# Altium PCB DecadeBox.PcbDoc
Units mil, origin at the board's own origin, x right, y up, seen from the top; angles counter-clockwise.
Board outline 7250 x 4000 mil, 2 copper layers (Top Layer, Bottom Layer); 139 components, 88 nets, 326 pads, 0 vias.
Unrouted connection lines stored in the file: 216.
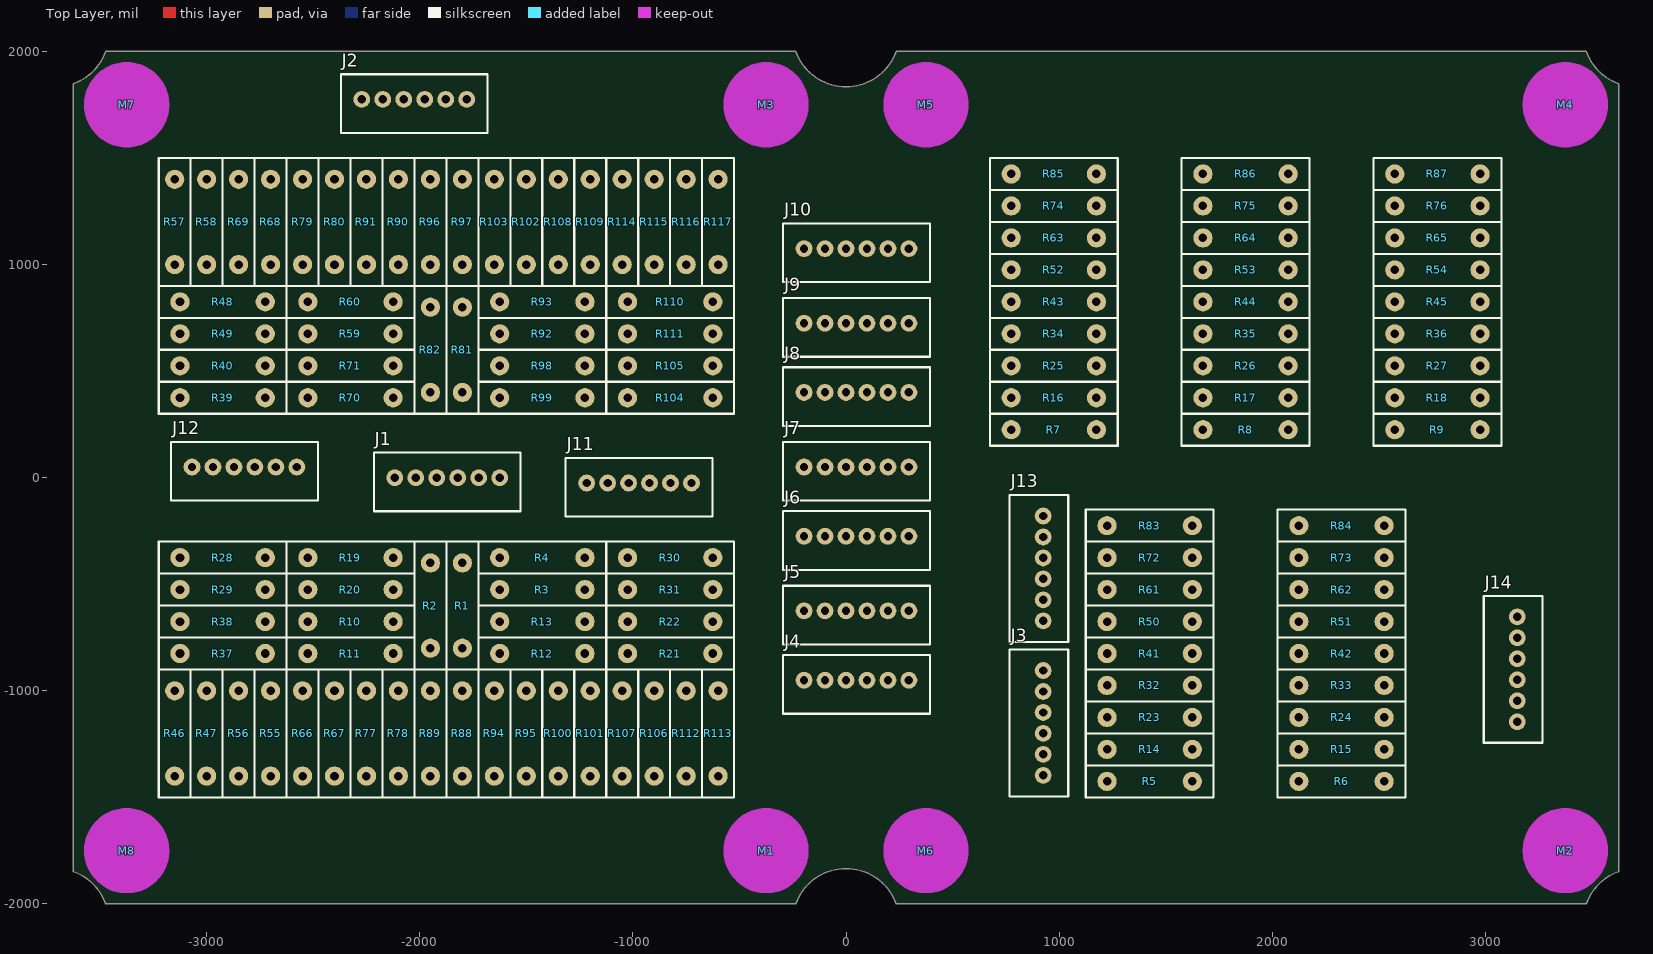
[diagram p0: Top Layer view]
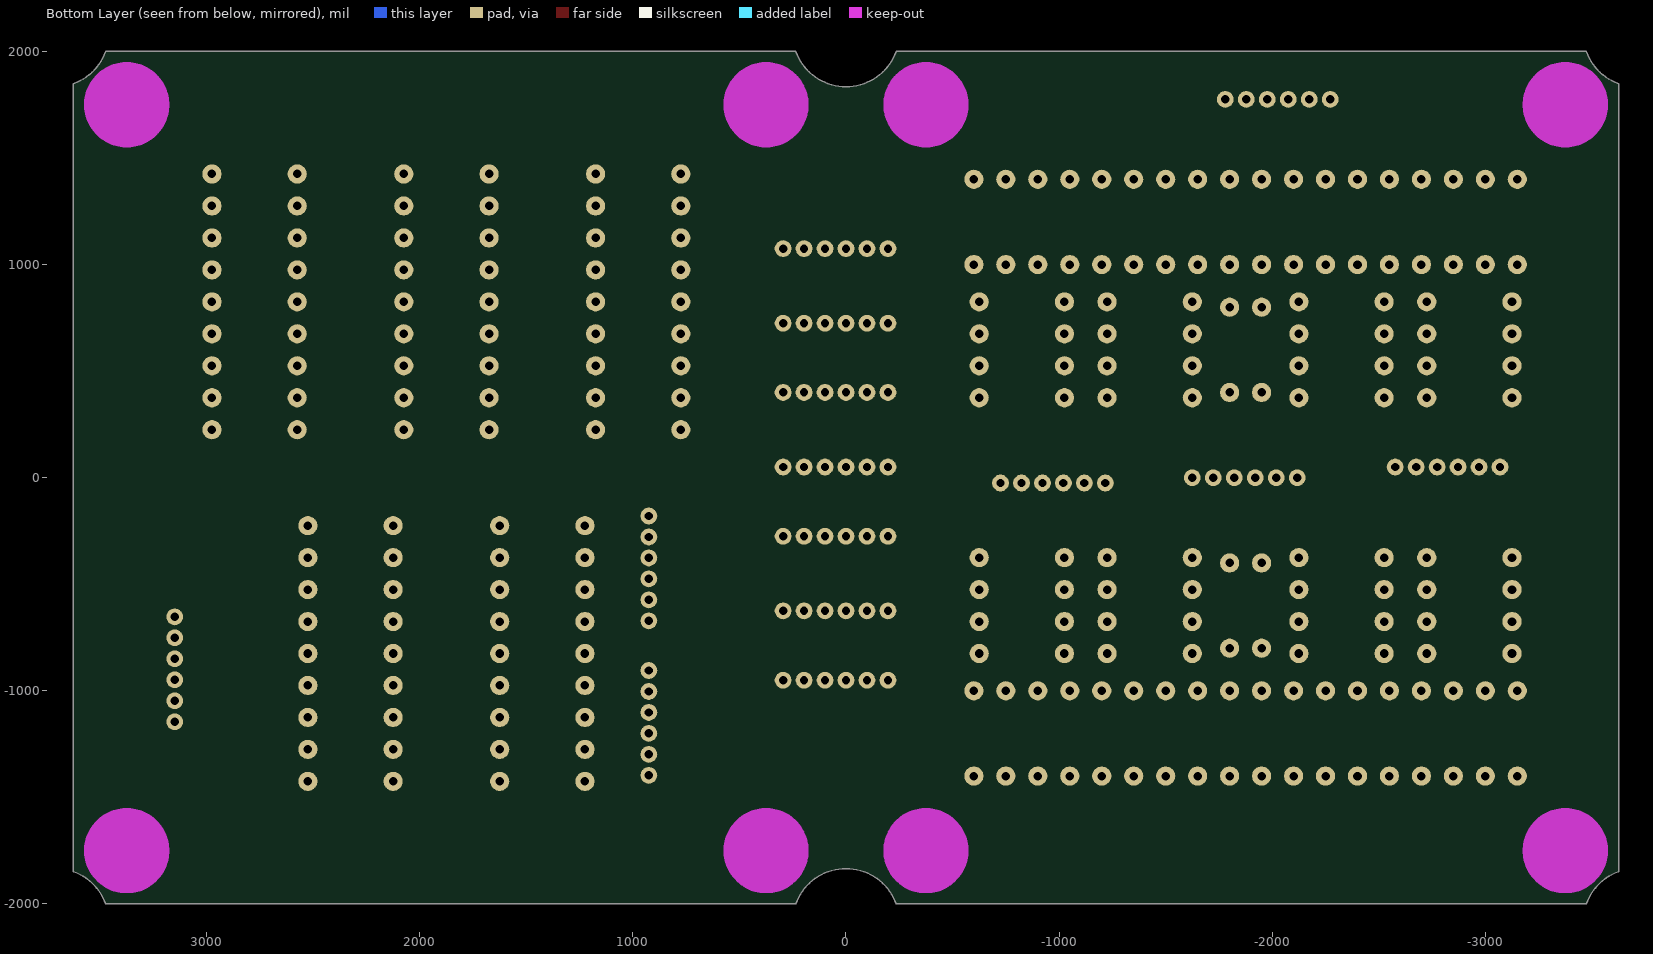
[diagram p1: Bottom Layer view, seen from below]

## Layer stack, top to bottom
Top Solder: solder mask 0.4, Solder Resist, Dk 3.5
Top Layer: signal copper 1.4
Dielectric 1: dielectric 12.6, FR-4, Dk 4.8
Bottom Layer: signal copper 1.4
Bottom Solder: solder mask 0.4, Solder Resist, Dk 3.5

## Board outline
-3473.53,-2000 ccw(c-3709,-2084) -3625,-1848.53 -3625,1848.53 ccw(c-3709,2084) -3473.53,2000 -235.47,2000 ccw(c0,2084) 235.47,2000 3473.53,2000 ccw(c3709,2084) 3625,1848.53 3625,-1848.53 ccw(c3709,-2084) 3473.53,-2000 235.47,-2000 ccw(c0,-2084) -235.47,-2000

## Design rules (kind name [scope] priority, off if disabled: settings)
Clearance [All] p1: gap=10 ignorepadtopadclearanceinfootprint=FALSE except(0: Arc-Hole Track-Hole SMDPad-Hole THPad-Hole Via-Hole Fill-Hole Poly-Hole Region-Hole Text-Hole)
PolygonConnect [All] p1: connectstyle=Relief reliefconductorwidth=10 reliefentries=4 polygonreliefangle="90 Angle" airgapwidth=10
RoutingVias [All] p1: holewidth=28 width=50 viastyle="Through Hole" minholewidth=28 minwidth=50 maxholewidth=28 maxwidth=50
SolderMaskExpansion [All] p1: expansion=4 istentingtop=FALSE
Width [All] p1: maxlimit=200 minlimit=10 preferedwidth=10
30 further rules are at their usual default settings.

## Components (designator, comment, footprint, x,y, rotation, side; value= is the part's Value field where it differs from the comment)
J1 "455-2271-ND" JST-XH -1625,0 r180 top
J2 "455-2271-ND" JST-XH -1779.72,1775 r180 top
J3 "455-2271-ND" JST-XH 925,-1396.85 r90 top
J4 "455-2271-ND" JST-XH 295.28,-950 r180 top
J5 "455-2271-ND" JST-XH 295.28,-625 r180 top
J6 "455-2271-ND" JST-XH 295.28,-275 r180 top
J7 "455-2271-ND" JST-XH 295.28,50 r180 top
J8 "455-2271-ND" JST-XH 295.28,400 r180 top
J9 "455-2271-ND" JST-XH 295.28,725 r180 top
J10 "455-2271-ND" JST-XH 295.28,1075 r180 top
J11 "455-2271-ND" JST-XH -725,-25 r180 top
J12 "455-2271-ND" JST-XH -2576.57,50 r180 top
J13 "455-2271-ND" JST-XH 925,-671.85 r90 top
J14 "455-2271-ND" JST-XH 3150,-1145.28 r90 top
M1 "MOUNTING HOLES" MTGHOLE -375,-1750 r0 top
M2 "MTGHOLE" MTGHOLE 3375,-1750 r0 top
M3 "MTGHOLE" MTGHOLE -375,1750 r0 top
M4 "MTGHOLE" MTGHOLE 3375,1750 r0 top
M5 "MTGHOLE" MTGHOLE 375,1750 r0 top
M6 "MTGHOLE" MTGHOLE 375,-1750 r0 top
M7 "MOUNTING HOLES" MTGHOLE -3375,1750 r0 top
M8 "MTGHOLE" MTGHOLE -3375,-1750 r0 top
R1 "BC3963CT-ND" MRS25 -1800,-600 r270 top value=1Ω
R2 "BC3963CT-ND" MRS25 -1950,-600 r270 top value=1Ω
R3 "BC3963CT-ND" MRS25 -1425,-525 r0 top value=1Ω
R4 "BC3963CT-ND" MRS25 -1425,-375 r0 top value=1Ω
R5 "PPC100ZCT-ND" MRS25 1425,-1425 r0 top value=100Ω
R6 "PPC1.00KZCT-ND" MRS25 2325,-1425 r0 top value=1kΩ
R7 "BC3955CT-ND" MRS25 975,225 r0 top value=10kΩ
R8 "BC3327CT-ND" MRS25 1875,225 r0 top value=100kΩ
R9 "56-MRS25000C1004FRP00CT-ND" MRS25 2775,225 r0 top value=1MΩ
R10 "BC3963CT-ND" MRS25 -2325,-675 r180 top value=1Ω
R11 "BC3963CT-ND" MRS25 -2325,-825 r180 top value=1Ω
R12 "BC3963CT-ND" MRS25 -1425,-825 r0 top value=1Ω
R13 "BC3963CT-ND" MRS25 -1425,-675 r0 top value=1Ω
R14 "PPC100ZCT-ND" MRS25 1425,-1275 r180 top value=100Ω
R15 "PPC1.00KZCT-ND" MRS25 2325,-1275 r180 top value=1kΩ
R16 "BC3955CT-ND" MRS25 975,375 r180 top value=10kΩ
R17 "BC3327CT-ND" MRS25 1875,375 r180 top value=100kΩ
R18 "56-MRS25000C1004FRP00CT-ND" MRS25 2775,375 r180 top value=1MΩ
R19 "BC3963CT-ND" MRS25 -2325,-375 r180 top value=1Ω
R20 "BC3963CT-ND" MRS25 -2325,-525 r180 top value=1Ω
R21 "BC3963CT-ND" MRS25 -825,-825 r0 top value=1Ω
R22 "BC3963CT-ND" MRS25 -825,-675 r0 top value=1Ω
R23 "PPC100ZCT-ND" MRS25 1425,-1125 r0 top value=100Ω
R24 "PPC1.00KZCT-ND" MRS25 2325,-1125 r0 top value=1kΩ
R25 "BC3955CT-ND" MRS25 975,525 r0 top value=10kΩ
R26 "BC3327CT-ND" MRS25 1875,525 r0 top value=100kΩ
R27 "56-MRS25000C1004FRP00CT-ND" MRS25 2775,525 r0 top value=1MΩ
R28 "BC3963CT-ND" MRS25 -2925,-375 r180 top value=1Ω
R29 "BC3963CT-ND" MRS25 -2925,-525 r180 top value=1Ω
R30 "BC3963CT-ND" MRS25 -825,-375 r180 top value=1Ω
R31 "BC3963CT-ND" MRS25 -825,-525 r180 top value=1Ω
R32 "PPC100ZCT-ND" MRS25 1425,-975 r180 top value=100Ω
R33 "PPC1.00KZCT-ND" MRS25 2325,-975 r180 top value=1kΩ
R34 "BC3955CT-ND" MRS25 975,675 r180 top value=10kΩ
R35 "BC3327CT-ND" MRS25 1875,675 r180 top value=100kΩ
R36 "56-MRS25000C1004FRP00CT-ND" MRS25 2775,675 r180 top value=1MΩ
R37 "BC3963CT-ND" MRS25 -2925,-825 r180 top value=1Ω
R38 "BC3963CT-ND" MRS25 -2925,-675 r180 top value=1Ω
R39 "PPC10.0ZCT-ND" MRS25 -2925,375 r180 top value=10Ω
R40 "PPC10.0ZCT-ND" MRS25 -2925,525 r180 top value=10Ω
R41 "PPC100ZCT-ND" MRS25 1425,-825 r0 top value=100Ω
R42 "PPC1.00KZCT-ND" MRS25 2325,-825 r0 top value=1kΩ
R43 "BC3955CT-ND" MRS25 975,825 r0 top value=10kΩ
R44 "BC3327CT-ND" MRS25 1875,825 r0 top value=100kΩ
R45 "56-MRS25000C1004FRP00CT-ND" MRS25 2775,825 r0 top value=1MΩ
R46 "BC3963CT-ND" MRS25 -3150,-1200 r270 top value=1Ω
R47 "BC3963CT-ND" MRS25 -3000,-1200 r270 top value=1Ω
R48 "PPC10.0ZCT-ND" MRS25 -2925,825 r0 top value=10Ω
R49 "PPC10.0ZCT-ND" MRS25 -2925,675 r0 top value=10Ω
R50 "PPC100ZCT-ND" MRS25 1425,-675 r180 top value=100Ω
R51 "PPC1.00KZCT-ND" MRS25 2325,-675 r180 top value=1kΩ
R52 "BC3955CT-ND" MRS25 975,975 r180 top value=10kΩ
R53 "BC3327CT-ND" MRS25 1875,975 r180 top value=100kΩ
R54 "56-MRS25000C1004FRP00CT-ND" MRS25 2775,975 r180 top value=1MΩ
R55 "BC3963CT-ND" MRS25 -2700,-1200 r270 top value=1Ω
R56 "BC3963CT-ND" MRS25 -2850,-1200 r270 top value=1Ω
R57 "PPC10.0ZCT-ND" MRS25 -3150,1200 r90 top value=10Ω
R58 "PPC10.0ZCT-ND" MRS25 -3000,1200 r90 top value=10Ω
R59 "PPC10.0ZCT-ND" MRS25 -2325,675 r0 top value=10Ω
R60 "PPC10.0ZCT-ND" MRS25 -2325,825 r0 top value=10Ω
R61 "PPC100ZCT-ND" MRS25 1425,-525 r0 top value=100Ω
R62 "PPC1.00KZCT-ND" MRS25 2325,-525 r0 top value=1kΩ
R63 "BC3955CT-ND" MRS25 975,1125 r0 top value=10kΩ
R64 "BC3327CT-ND" MRS25 1875,1125 r0 top value=100kΩ
R65 "56-MRS25000C1004FRP00CT-ND" MRS25 2775,1125 r0 top value=1MΩ
R66 "BC3963CT-ND" MRS25 -2550,-1200 r90 top value=1Ω
R67 "BC3963CT-ND" MRS25 -2400,-1200 r90 top value=1Ω
R68 "PPC10.0ZCT-ND" MRS25 -2700,1200 r270 top value=10Ω
R69 "PPC10.0ZCT-ND" MRS25 -2850,1200 r270 top value=10Ω
R70 "PPC10.0ZCT-ND" MRS25 -2325,375 r0 top value=10Ω
R71 "PPC10.0ZCT-ND" MRS25 -2325,525 r0 top value=10Ω
R72 "PPC100ZCT-ND" MRS25 1425,-375 r180 top value=100Ω
R73 "PPC1.00KZCT-ND" MRS25 2325,-375 r180 top value=1kΩ
R74 "BC3955CT-ND" MRS25 975,1275 r180 top value=10kΩ
R75 "BC3327CT-ND" MRS25 1875,1275 r180 top value=100kΩ
R76 "56-MRS25000C1004FRP00CT-ND" MRS25 2775,1275 r180 top value=1MΩ
R77 "BC3963CT-ND" MRS25 -2250,-1200 r270 top value=1Ω
R78 "BC3963CT-ND" MRS25 -2100,-1200 r270 top value=1Ω
R79 "PPC10.0ZCT-ND" MRS25 -2550,1200 r90 top value=10Ω
R80 "PPC10.0ZCT-ND" MRS25 -2400,1200 r90 top value=10Ω
R81 "PPC10.0ZCT-ND" MRS25 -1800,600 r90 top value=10Ω
R82 "PPC10.0ZCT-ND" MRS25 -1950,600 r90 top value=10Ω
R83 "PPC100ZCT-ND" MRS25 1425,-225 r0 top value=100Ω
R84 "PPC1.00KZCT-ND" MRS25 2325,-225 r0 top value=1kΩ
R85 "BC3955CT-ND" MRS25 975,1425 r0 top value=10kΩ
R86 "BC3327CT-ND" MRS25 1875,1425 r0 top value=100kΩ
R87 "56-MRS25000C1004FRP00CT-ND" MRS25 2775,1425 r0 top value=1MΩ
R88 "BC3963CT-ND" MRS25 -1800,-1200 r90 top value=1Ω
R89 "BC3963CT-ND" MRS25 -1950,-1200 r90 top value=1Ω
R90 "PPC10.0ZCT-ND" MRS25 -2100,1200 r270 top value=10Ω
R91 "PPC10.0ZCT-ND" MRS25 -2250,1200 r270 top value=10Ω
R92 "PPC10.0ZCT-ND" MRS25 -1425,675 r0 top value=10Ω
R93 "PPC10.0ZCT-ND" MRS25 -1425,825 r0 top value=10Ω
R94 "BC3963CT-ND" MRS25 -1650,-1200 r270 top value=1Ω
R95 "BC3963CT-ND" MRS25 -1500,-1200 r270 top value=1Ω
R96 "PPC10.0ZCT-ND" MRS25 -1950,1200 r90 top value=10Ω
R97 "PPC10.0ZCT-ND" MRS25 -1800,1200 r90 top value=10Ω
R98 "PPC10.0ZCT-ND" MRS25 -1425,525 r0 top value=10Ω
R99 "PPC10.0ZCT-ND" MRS25 -1425,375 r0 top value=10Ω
R100 "BC3963CT-ND" MRS25 -1350,-1200 r90 top value=1Ω
R101 "BC3963CT-ND" MRS25 -1200,-1200 r90 top value=1Ω
R102 "PPC10.0ZCT-ND" MRS25 -1500,1200 r270 top value=10Ω
R103 "PPC10.0ZCT-ND" MRS25 -1650,1200 r270 top value=10Ω
R104 "PPC10.0ZCT-ND" MRS25 -825,375 r0 top value=10Ω
R105 "PPC10.0ZCT-ND" MRS25 -825,525 r0 top value=10Ω
R106 "BC3963CT-ND" MRS25 -900,-1200 r270 top value=1Ω
R107 "BC3963CT-ND" MRS25 -1050,-1200 r270 top value=1Ω
R108 "PPC10.0ZCT-ND" MRS25 -1350,1200 r90 top value=10Ω
R109 "PPC10.0ZCT-ND" MRS25 -1200,1200 r90 top value=10Ω
R110 "PPC10.0ZCT-ND" MRS25 -825,825 r0 top value=10Ω
R111 "PPC10.0ZCT-ND" MRS25 -825,675 r0 top value=10Ω
R112 "BC3963CT-ND" MRS25 -750,-1200 r90 top value=1Ω
R113 "BC3963CT-ND" MRS25 -600,-1200 r90 top value=1Ω
R114 "PPC10.0ZCT-ND" MRS25 -1050,1200 r270 top value=10Ω
R115 "PPC10.0ZCT-ND" MRS25 -900,1200 r270 top value=10Ω
R116 "PPC10.0ZCT-ND" MRS25 -750,1200 r90 top value=10Ω
R117 "PPC10.0ZCT-ND" MRS25 -600,1200 r90 top value=10Ω

## Footprints (in the part's own frame and the unit in brackets; to place one, negate y for a bottom-side part, rotate by r counter-clockwise, add the part's x,y. Pads: shape width x height; smd on the part's side, far side on the other; paste and mask are expansions set on the pad)
JST-XH [mm]
  round 2 hole 1: 1(0,0) 2(2.5,0) 3(5,0) 4(7.5,0) 5(10,0) 6(12.5,0)
  silkscreen extent -2.5,-3 15,4
MRS25 [mil] "VISHAY"
  round 90 hole 40: 1(-200,0) 2(200,0)
  silkscreen extent -300,-75 300,75, body extent -128,-49 128,49, height 98
MTGHOLE [mil]
  round 0 hole 128 unplated mask+125: 0(0,0)
  Keep-Out Layer circle w200: c0,0 r100

## Part data
J1 J2 J3 J4 J5 J6 J7 J8 J9 J10 J11 J12 J13 J14: library part JST-6PIN, "JST XH, Through-Hole, 6-Pos", Supplier 1=Digi-Key, Supplier Part Number 1=455-2271-ND
M1 M7: library part MTGHOLE, "MOUNTING HOLE"
M2 M3 M4 M5 M6 M8: "MOUNTING HOLE"
R1 R2 R3 R4 R10 R11 R12 R13 R19 R20 R21 R22 R28 R29 R30 R31 R37 R38 R46 R47 R55 R56 R66 R67 R77 R78 R88 R89 R94 R95 R100 R101 R106 R107 R112 R113: library part RES-1OHM, "RES 1Ω 1% 50ppm/K 600mW", Power=600mW, Tolerance="1% + 50ppm/K", Supplier 1=Digi-Key, Supplier Part Number 1=BC3963CT-ND
R5 R14 R23 R32 R41 R50 R61 R72 R83: library part RES-100OHM, "RES 100Ω 1% 50ppm/K 600mW", Power=600mW, Tolerance="1% + 50ppm/K", Supplier 1=Digi-Key, Supplier Part Number 1=PPC100ZCT-ND
R6 R15 R24 R33 R42 R51 R62 R73 R84: library part RES-1KOHM, "RES 1kΩ 1% 50ppm/K 600mW", Power=600mW, Tolerance="1% + 50ppm/K", Supplier 1=Digi-Key, Supplier Part Number 1=PPC1.00KZCT-ND
R7 R16 R25 R34 R43 R52 R63 R74 R85: library part RES-10KOHM, "RES 10kΩ 1% 50ppm/K 600mW", Power=600mW, Tolerance="1% + 50ppm/K", Supplier 1=Digi-Key, Supplier Part Number 1=BC3955CT-ND
R8 R17 R26 R35 R44 R53 R64 R75 R86: library part RES-100KOHM, "RES 100kΩ 1% 50ppm/K 600mW", Power=600mW, Tolerance="1% + 50ppm/K", Supplier 1=Digi-Key, Supplier Part Number 1=BC3327CT-ND
R9 R18 R27 R36 R45 R54 R65 R76 R87: library part RES-1MOHM, "RES 1MΩ 1% 50ppm/K 600mW", Power=600mW, Tolerance="1% + 50ppm/K", Supplier 1=Digi-Key, Supplier Part Number 1=56-MRS25000C1004FRP00CT-ND
R39 R40 R48 R49 R57 R58 R59 R60 R68 R69 R70 R71 R79 R80 R81 R82 R90 R91 R92 R93 R96 R97 R98 R99 R102 R103 R104 R105 R108 R109 R110 R111 R114 R115 R116 R117: library part RES-10OHM, "RES 10Ω 1% 50ppm/K 600mW", Power=600mW, Tolerance="1% + 50ppm/K", Supplier 1=Digi-Key, Supplier Part Number 1=PPC10.0ZCT-ND

## Nets (pads, with @x,y where several pads share a name; then routed paths per layer and width w, separated by ;. In a path a pad name is that pad's centre, name@x,y a point inside that pad or via, vN(x,y) a via of type N, cw(c..) or ccw(c..) an arc to the next point about the centre after c; other vN are vias at no path point)
NetR1_2: R1.2 R2.2 R10.1 R11.1
NetR3_2: R3.2 R4.2 R12.1 R13.1
NetR19_2: R19.2 R20.2 R28.1 R29.1
NetR21_2: R21.2 R22.2 R30.1 R31.1
NetR37_2: R37.2 R38.2 R46.1 R47.1
NetR39_2: R39.2 R40.2 R48.1 R49.1
NetR55_2: R55.2 R56.2 R66.1 R67.1
NetR57_2: R57.2 R58.2 R68.1 R69.1
NetR59_2: R59.2 R60.2 R70.1 R71.1
NetR77_2: R77.2 R78.2 R88.1 R89.1
NetR79_2: R79.2 R80.2 R90.1 R91.1
NetR81_2: R81.2 R82.2 R92.1 R93.1
NetR94_2: R94.2 R95.2 R100.1 R101.1
NetR96_2: R96.2 R97.2 R102.1 R103.1
NetR98_2: R98.2 R99.2 R104.1 R105.1
NetR106_2: R106.2 R107.2 R112.1 R113.1
NetR108_2: R108.2 R109.2 R114.1 R115.1
NetR110_2: R110.2 R111.2 R116.1 R117.1
P0_1K: J4.2 R6.1
P0_1M: J9.2 R9.1
P0_1R: J1.2 R112.2 R113.2
P0_10K: J5.2 R7.1
P0_10R: J2.2 R57.1 R58.1
P0_100K: J7.2 R8.1
P0_100R: J3.2 R5.1
P1_1K: J4.3 R6.2 R15.1
P1_1M: J9.3 R9.2 R18.1
P1_1R: J1.3 R100.2 R101.2 R106.1 R107.1
P1_10K: J5.3 R7.2 R16.1
P1_10R: J2.3 R68.2 R69.2 R79.1 R80.1
P1_100K: J7.3 R8.2 R17.1
P1_100R: J3.3 R5.2 R14.1
P2_1K: J4.4 R15.2 R24.1
P2_1M: J9.4 R18.2 R27.1
P2_1R: J1.4 R88.2 R89.2 R94.1 R95.1
P2_10K: J5.4 R16.2 R25.1
P2_10R: J2.4 R90.2 R91.2 R96.1 R97.1
P2_100K: J7.4 R17.2 R26.1
P2_100R: J3.4 R14.2 R23.1
P3_1K: J4.5 R24.2 R33.1
P3_1M: J9.5 R27.2 R36.1
P3_1R: J1.5 R66.2 R67.2 R77.1 R78.1
P3_10K: J5.5 R25.2 R34.1
P3_10R: J2.5 R102.2 R103.2 R108.1 R109.1
P3_100K: J7.5 R26.2 R35.1
P3_100R: J3.5 R23.2 R32.1
P4_1K: J4.6 R33.2 R42.1
P4_1M: J9.6 R36.2 R45.1
P4_1R: J1.6 R46.2 R47.2 R55.1 R56.1
P4_10K: J5.6 R34.2 R43.1
P4_10R: J2.6 R114.2 R115.2 R116.2 R117.2
P4_100K: J7.6 R35.2 R44.1
P4_100R: J3.6 R32.2 R41.1
P5_1K: J14.1 R42.2 R51.1
P5_1M: J10.1 R45.2 R54.1
P5_1R: J11.1 R28.2 R29.2 R37.1 R38.1
P5_10K: J6.1 R43.2 R52.1
P5_10R: J12.1 R104.2 R105.2 R110.1 R111.1
P5_100K: J8.1 R44.2 R53.1
P5_100R: J13.1 R41.2 R50.1
P6_1K: J14.2 R51.2 R62.1
P6_1M: J10.2 R54.2 R65.1
P6_1R: J11.2 R10.2 R11.2 R19.1 R20.1
P6_10K: J6.2 R52.2 R63.1
P6_10R: J12.2 R92.2 R93.2 R98.1 R99.1
P6_100K: J8.2 R53.2 R64.1
P6_100R: J13.2 R50.2 R61.1
P7_1K: J14.3 R62.2 R73.1
P7_1M: J10.3 R65.2 R76.1
P7_1R: J11.3 R1.1 R2.1 R3.1 R4.1
P7_10K: J6.3 R63.2 R74.1
P7_10R: J12.3 R70.2 R71.2 R81.1 R82.1
P7_100K: J8.3 R64.2 R75.1
P7_100R: J13.3 R61.2 R72.1
P8_1K: J14.4 R73.2 R84.1
P8_1M: J10.4 R76.2 R87.1
P8_1R: J11.4 R12.2 R13.2 R21.1 R22.1
P8_10K: J6.4 R74.2 R85.1
P8_10R: J12.4 R48.2 R49.2 R59.1 R60.1
P8_100K: J8.4 R75.2 R86.1
P8_100R: J13.4 R72.2 R83.1
P9_1K: J14.5 R84.2
P9_1M: J10.5 R87.2
P9_1R: J11.5 R30.2 R31.2
P9_10K: J6.5 R85.2
P9_10R: J12.5 R39.1 R40.1
P9_100K: J8.5 R86.2
P9_100R: J13.5 R83.2
pads on no net: J1.1 J2.1 J3.1 J4.1 J5.1 J6.6 J7.1 J8.6 J9.1 J10.6 J11.6 J12.6 J13.6 J14.6 M1.0 M2.0 M3.0 M4.0 M5.0 M6.0 M7.0 M8.0

## Silkscreen, mask and mechanical layers (free items; w line width, h text height)
Board Shape:
  the board outline again, w100